# Altium PCB Pro_Micro_582V0.1.PcbDoc
Units mil, origin at the board's own origin, x right, y up, seen from the top; angles counter-clockwise.
Board outline 1377.89 x 700 mil, 4 copper layers (Top Layer, GND, POWER, Bottom Layer), stack 23.756 mil thick; 23 components, 43 nets, 148 pads, 90 vias.
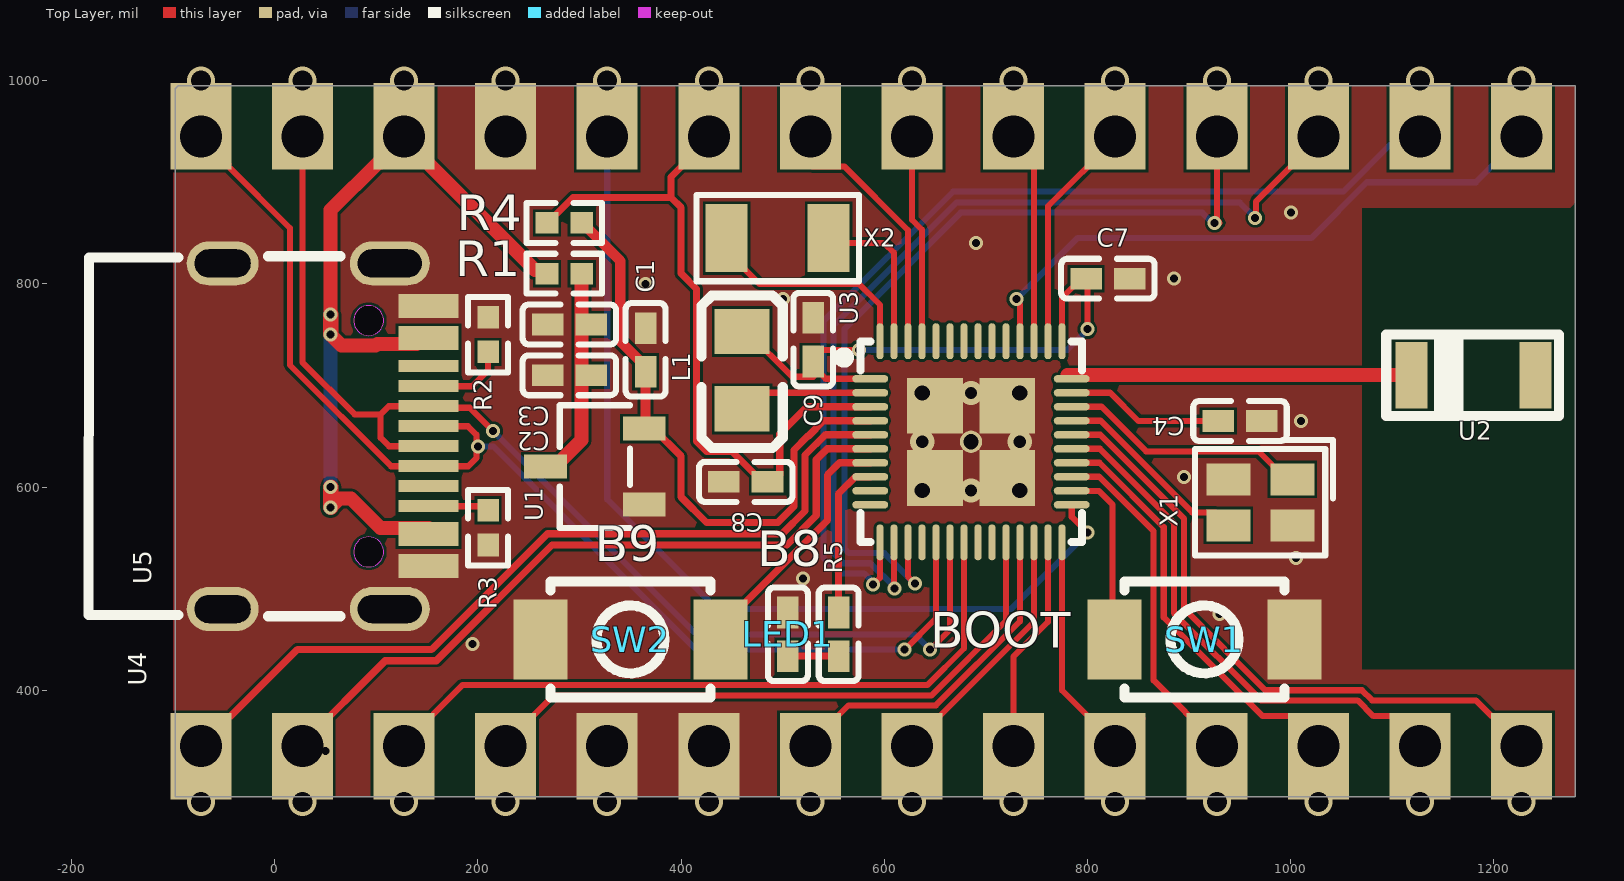
[diagram p0: Top Layer view]
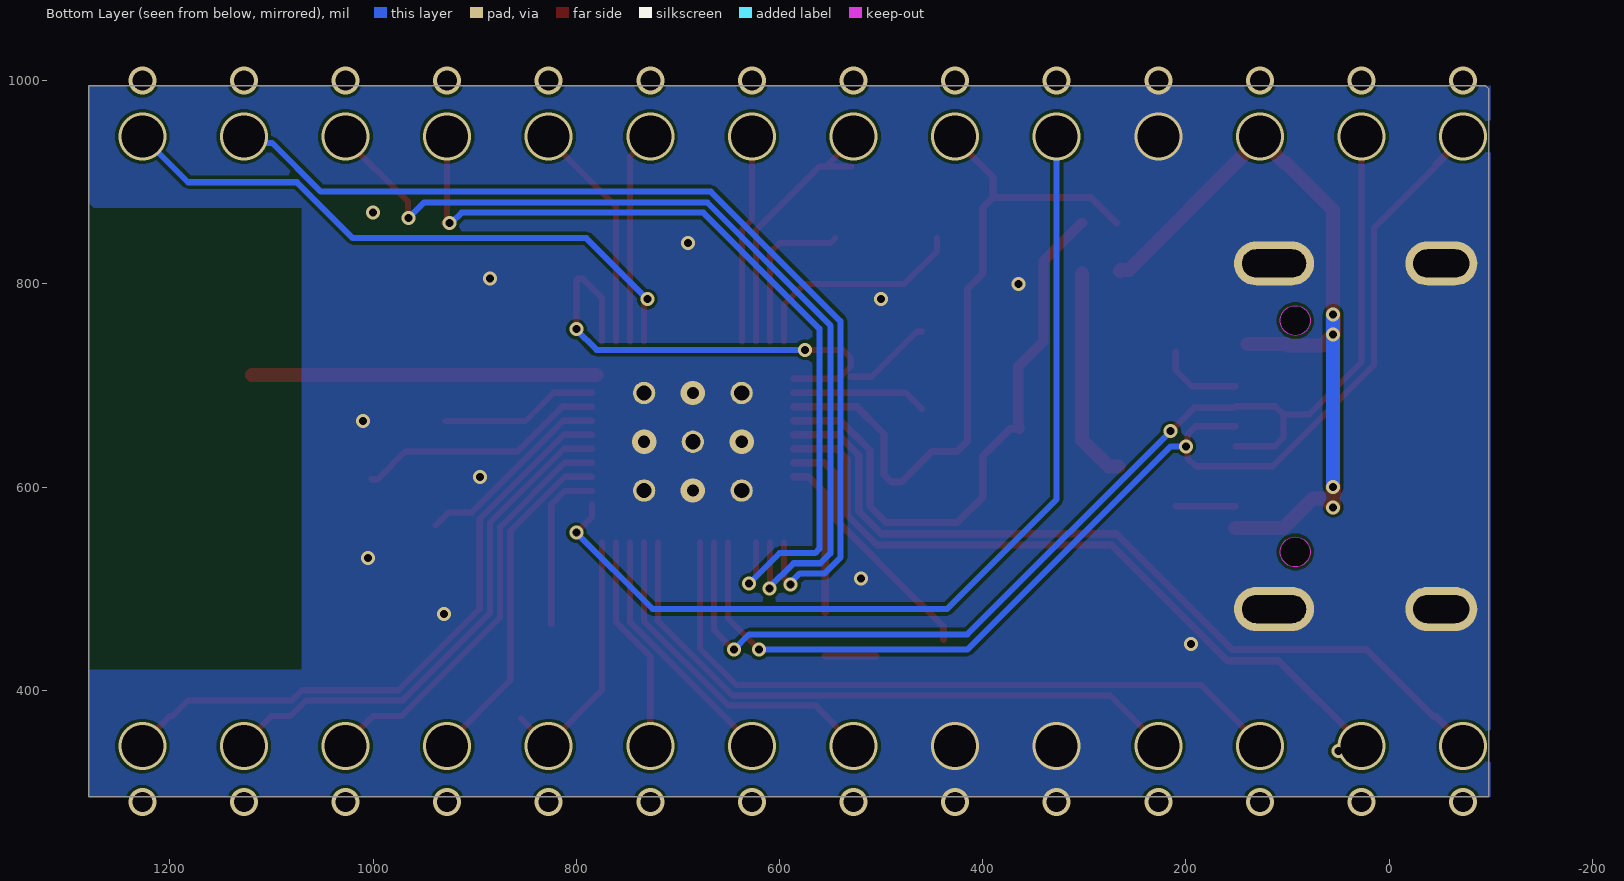
[diagram p1: Bottom Layer view, seen from below]
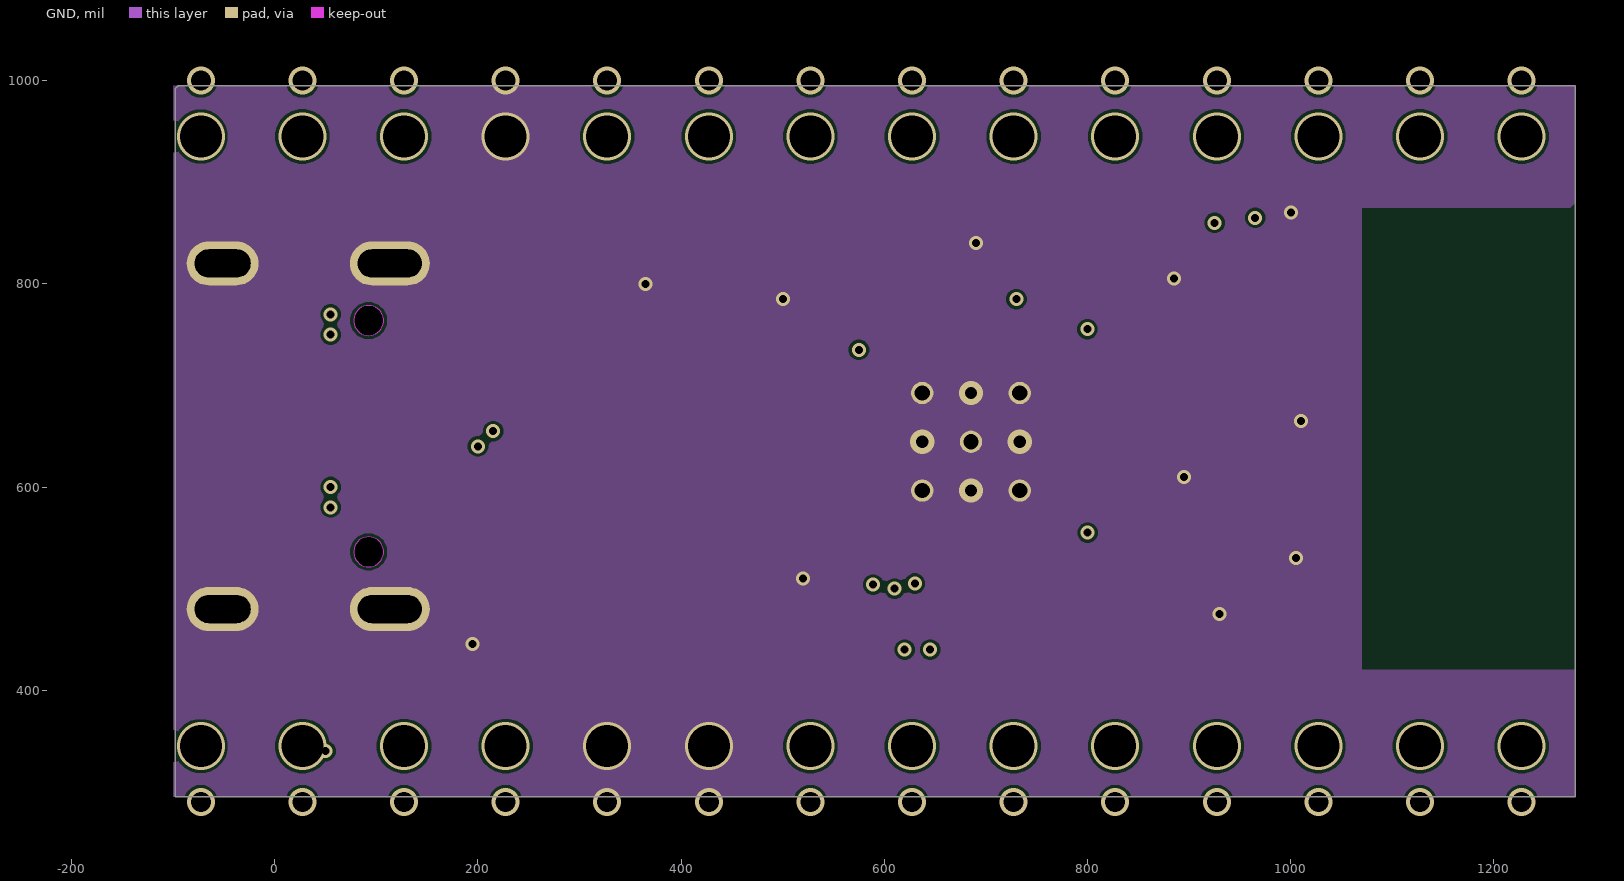
[diagram p2: GND]
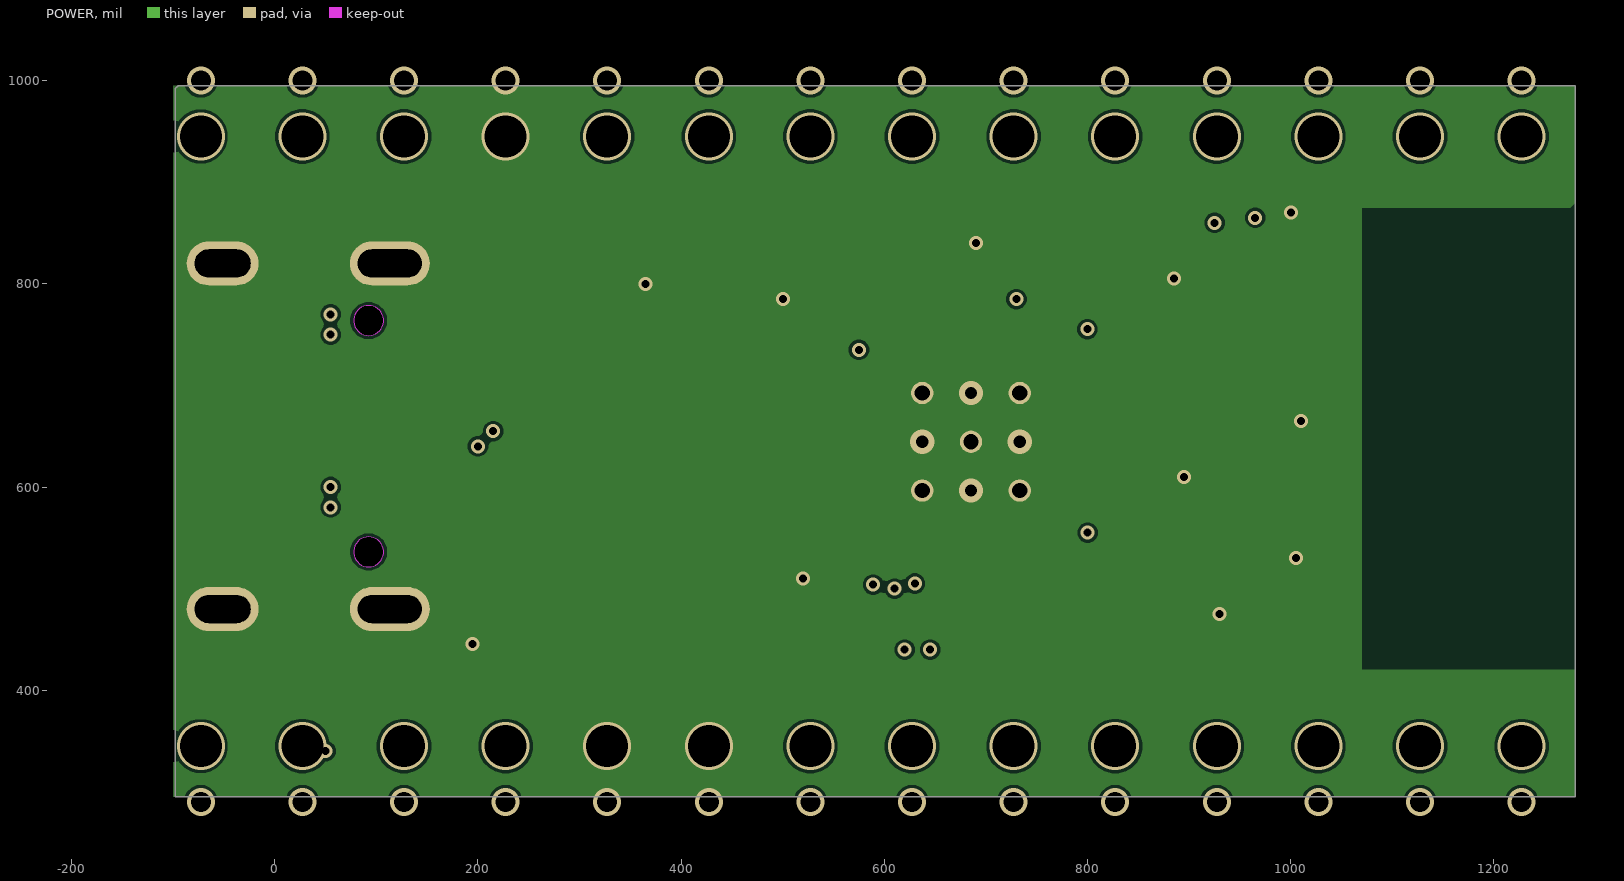
[diagram p3: POWER]

## Layer stack, top to bottom
Top Solder: solder mask 0.4, Solder Resist, Dk 3.5
Top Layer: signal copper 1.4
Dielectric 2: prepreg 2.8, PP-006, Dk 4.1
GND: signal copper 1.378
Dielectric 1: dielectric 12.6, FR-4, Dk 4.8
POWER: signal copper 1.378
Dielectric 3: prepreg 2.8, PP-006, Dk 4.1
Bottom Layer: signal copper 1.4
Bottom Solder: solder mask 0.4, Solder Resist, Dk 3.5

## Board outline
1280,295 -97.89,295 -97.89,992.11 -95,995 1280,995

## Design rules (kind name [scope] priority, off if disabled: settings)
Clearance [All] p1: gap=3 ignorepadtopadclearanceinfootprint=FALSE except(0: Arc-Text Track-Text SMDPad-Text THPad-Text Via-Text Fill-Text Poly-Text Region-Text Text-Text Text-Hole; 4: Arc-Arc Arc-Track Track-Track)
ComponentClearance [All] p1: gap=0 collisioncheckmode=3 verticalgap=0 showdistances=FALSE donotcheckwithout3dbody=TRUE
HoleSize [All] p1: absolutevalues=TRUE maxlimit=118.11 minlimit=1 maxpercent=80.000 minpercent=20.000
HoleToHoleClearance [All] p1: gap=0 allowstackedmicrovias=TRUE
MinimumSolderMaskSliver [All] p1: minsoldermaskwidth=0
PlaneConnect [All] p1: planeconnectstyle=Direct reliefexpansion=20 reliefentries=4 reliefconductorwidth=10 reliefairgap=10
PolygonConnect [All] p1: connectstyle=Direct reliefconductorwidth=10 reliefentries=4 polygonreliefangle="90 Angle" airgapwidth=10
RoomDefinition MCU [InComponentClass('MCU')] p1: confinementstyle=ConfineIn formatcopy=TRUE lockcomponents=FALSE outline -2570,-1895 -570,-1895 -570,-895 -2570,-895
RoutingVias [All] p1: holewidth=28 width=50 viastyle="Through Hole" minholewidth=0 minwidth=1 maxholewidth=78.74 maxwidth=78.74
SilkToSilkClearance [All] p1: silktosilkclearance=0
SilkToSolderMaskClearance [IsPad] p1: minsilkscreentomaskgap=0 clearancetoexposedcopper=TRUE
SolderMaskExpansion [All] p1: expansion=4 istentingtop=FALSE
Width [All] p1: maxlimit=15 minlimit=4 preferedwidth=4 midlayer1_maxwidth=10 midlayer2_maxwidth=10 minimp=50.000000 maximp=50.000000 favimp=50.000000
23 further rules are at their usual default settings.

## Components (designator, comment, footprint, x,y, rotation, side; value= is the part's Value field where it differs from the comment)
C1 "100nF" C0402 365,735 r270 top
C2 "10nF" C0402 290,710 r0 top
C3 "100nF" C0402 290,760 r0 top
C4 "2.2uF" C0402 950,665 r0 top
C7 "100nF" C0402 820,805 r0 top
C8 "2.2uF" C0402 463.54,605 r0 top
C9 "2.2uF" C0402 530,745 r270 top
L1 "22uH" L0805 460,715 r90 top
LED1 "0R" C0402 505,455 r270 top
R1 "0R" R0402 285,810 r180 top
R2 "5.1K" R0402 210,750 r90 top
R3 "5.1K" R0402 210,560 r270 top
R4 "0R" R0402 285,860 r0 top
R5 "220r" C0402 555,455 r270 top
SW1 "JT1185SAEM" SW-SMD_L3.9-W2.9-P4.15-LS5.0 915,450 r0 top
SW2 "JT1185SAEM" SW-SMD_L3.9-W2.9-P4.15-LS5.0 350,450 r180 top
U1 "XC6206P332MR" SOT-23-3_L2.9-W1.6-P1.90-LS2.8-BR 315,620 r0 top
U2 "RFANT3216120A5T" FILTER-SMD_1206-2P-L3.2-W1.6-L 1180,710 r0 top
U3 "CH582M" QFN48_5X5 685.24,644.52 r270 top locked
U4 "PROMICRO" PROMICRO邮票孔 565,645 r90 top locked
U5 "20009-UCAF001-X" TYPE-C-SMD_20009-UCAF001-X 50,650 r270 top locked
X1 "X201632MOB4SI" CRYSTAL-SMD_4P-L2.0-W1.6-BL-2 970,585 r180 top value=32MHz
X2 "SC-32S32.768kHz20PPM12.5pF" OSC-SMD_L3.2-W1.5 495,845 r0 top value=-

## Footprints (in the part's own frame and the unit in brackets; to place one, negate y for a bottom-side part, rotate by r counter-clockwise, add the part's x,y. Pads: shape width x height; smd on the part's side, far side on the other; paste and mask are expansions set on the pad)
C0402 [mm]
  rect 0.79x0.54 smd: 1(-0.545,0) 2(0.545,0)
  silkscreen extent -1.17,-0.5 1.17,0.5
CRYSTAL-SMD_4P-L2.0-W1.6-BL-2 [mm]
  rect 1.1x0.8 smd mask+0.051: 1(-0.8,-0.575) 2(0.8,-0.575) 3(0.8,0.575) 4(-0.8,0.575)
  silkscreen extent -1.82,-1.56 1.64,1.33
FILTER-SMD_1206-2P-L3.2-W1.6-L [mm]
  rect 0.8x1.66 smd mask+0.051: 1(-1.55,0) 2(1.55,0)
  silkscreen extent -2.19,-1.02 2.13,1.02
L0805 [mil]
  rect 44.59x54.21 smd: 1(-38.05,0) 2(38.04,0)
  silkscreen extent -77,-40 73,40
OSC-SMD_L3.2-W1.5 [mm]
  rect 1.05x1.7 smd mask+0.051: 1(-1.275,0) 2(1.275,0)
  silkscreen extent -2.03,-1.08 2.03,1.08
PROMICRO邮票孔 [mil]
  rect 85x60 smd: 1(310,437.8) 2(310,337.8) 3(310,237.8) 4(310,137.8) 5(310,37.8) 6(310,-62.2) 7(310,-162.2) 8(310,-262.2) 9(310,-362.2) 10(310,-462.2) 11(310,-562.2) 12(310,-662.2) 13(-310,437.8) 14(-310,337.8) 15(-310,237.8) 16(-310,137.8) 17(-310,37.8) 18(-310,-62.2) 19(-310,-162.2) 20(-310,-262.2) 21(-310,-362.2) 22(-310,-462.2) 23(-310,-562.2) 24(-310,-662.2) 25(310,537.8) 26(310,637.8) 27(-310,537.8) 28(-310,637.8)
QFN48_5X5 [mm]
  round 0.559 hole 0.381 mask+0.102: 0(-1.219,1.219) 0(-1.219,-1.219) 0(0,0) 0(1.219,1.219) 0(1.219,-1.219)
  rect 1.397x1.397 smd mask+0: 0(-0.901,0.908) 0(-0.901,-0.895) 0(0.902,0.908) 0(0.902,-0.895)
  oval 0.18x0.9 smd mask+0.051: 1(-1.575,-2.519) 2(-1.225,-2.519) 3(-0.875,-2.519) 4(-0.525,-2.519) 5(-0.175,-2.519) 6(0.175,-2.519) 7(0.525,-2.519) 8(0.875,-2.519) 9(1.225,-2.519) 10(1.575,-2.519) 25(1.575,2.519) 26(1.225,2.519) 27(0.875,2.519) 28(0.525,2.519) 29(0.175,2.519) 30(-0.175,2.519) 31(-0.525,2.519) 32(-0.875,2.519) 33(-1.225,2.519) 34(-1.575,2.519)
  oval 0.9x0.18 smd mask+0.051: 11(2.514,-2.275) 12(2.514,-1.925) 13(2.514,-1.575) 14(2.514,-1.225) 15(2.514,-0.875) 16(2.514,-0.525) 17(2.514,-0.175) 18(2.514,0.175) 19(2.514,0.525) 20(2.514,0.875) 21(2.514,1.225) 22(2.514,1.575) 23(2.514,1.925) 24(2.514,2.275) 35(-2.514,2.275) 36(-2.514,1.925) 37(-2.514,1.575) 38(-2.514,1.225) 39(-2.514,0.875) 40(-2.514,0.525) 41(-2.514,0.175) 42(-2.514,-0.175) 43(-2.514,-0.525) 44(-2.514,-0.875) 45(-2.514,-1.225) 46(-2.514,-1.575) 47(-2.514,-1.925) 48(-2.514,-2.275)
  silkscreen extent -2.51,-3.31 2.51,2.77
R0402 [mm]
  rect 0.566x0.54 smd: 1(-0.433,0) 2(0.433,0)
  silkscreen extent -0.94,-0.5 0.94,0.5
SOT-23-3_L2.9-W1.6-P1.90-LS2.8-BR [mm]
  rect 1.07x0.6 smd: 1(1.235,-0.95) 2(1.235,0.95) 3(-1.235,0)
  silkscreen extent -0.88,-1.54 0.88,1.54
SW-SMD_L3.9-W2.9-P4.15-LS5.0 [mm]
  rect 1.35x2 smd: 1(-2.25,0) 2(2.25,0)
  silkscreen extent -2,-1.45 2,1.45
TYPE-C-SMD_20009-UCAF001-X [mm]
  oval 1.1x2 hole 0.7 slot 1.6 at 90 deg mask+0.051: 1(-4.32,1.606) 2(4.32,1.606)
  oval 1.1x1.8 hole 0.7 slot 1.4 at 90 deg mask+0.051: 3(4.32,-2.574) 4(-4.32,-2.574)
  rect 0.3x1.5 smd mask+0.051: A1(-3.4,2.573) A4(-2.6,2.573) A5(-1.25,2.573) A6(-0.25,2.573) A7(0.25,2.573) A8(1.25,2.574) A9(2.6,2.573) A12(3.4,2.573) B1(3.1,2.573) B4(2.3,2.573) B5(1.75,2.573) B6(0.75,2.573) B7(-0.75,2.573) B8(-1.75,2.574) B9(-2.3,2.573) B12(-3.1,2.573)
  Keep-Out Layer board cut-out: -2.515,1.076 -2.552,1.239 -2.656,1.369 -2.807,1.442 -2.973,1.442 -3.124,1.369 -3.228,1.239 -3.265,1.076 -3.265,1.076 -3.228,0.913 -3.124,0.783 -2.973,0.71 -2.807,0.71 -2.656,0.783 -2.552,0.913 -2.515,1.076
  Keep-Out Layer board cut-out: 3.265,1.076 3.228,1.239 3.124,1.369 2.973,1.442 2.807,1.442 2.656,1.369 2.552,1.239 2.515,1.076 2.515,1.076 2.552,0.913 2.656,0.783 2.807,0.71 2.973,0.71 3.124,0.783 3.228,0.913 3.265,1.076
  silkscreen extent -4.5,-5.92 4.5,0.37

## Part data
C1 C2 C3 C4 C7 C8 C9: library part 电容, BOM_Manufacturer=YAGEO, BOM_Manufacturer Part=CC0805KKX5R6BB106, BOM_Supplier=LCSC, BOM_Supplier Part=C89832, nameAlias=Capacitance, spicePre=C, spiceSymbolName=CC0805KKX5R6BB106
L1: BOM_JLCPCB Part Class="Extended Part", BOM_Manufacturer="TAIYO YUDEN(太诱)", BOM_Manufacturer Part=CBC2012T220K, BOM_Supplier=LCSC, BOM_Supplier Part=C223184, Contributor=LCSC, nameAlias=Inductance, spicePre=L, spiceSymbolName=CBC2012T220K
LED1 R1 R2 R3 R4 R5: library part 电阻, BOM_JLCPCB Part Class="Basic Part", BOM_Manufacturer=UniOhm, BOM_Manufacturer Part=0603WAF1002T5E, Resistance (Ohms)=10K, BOM_Supplier=LCSC, BOM_Supplier Part=C25804, nameAlias=Resistance, spicePre=R, spiceSymbolName=0603WAF1002T5E
SW1 SW2: BOM_JLCPCB Part Class="Extended Part", BOM_Manufacturer=NAMAE(韩国南涯), BOM_Manufacturer Part=JT1185SAEM, BOM_Supplier=LCSC, BOM_Supplier Part=C465068, Contributor=LCSC, spicePre=S, spiceSymbolName=JT1185SAEM
U1: BOM_JLCPCB Part Class="Basic Part", BOM_Manufacturer=TOREX, BOM_Manufacturer Part=XC6206P332MR, BOM_Supplier=LCSC, BOM_Supplier Part=C5446, spicePre=U, spiceSymbolName=XC6206P332MR
U2: Central Frequency=-, JLCPCB Part Class="Extended Part", Manufacturer=Walsin(华新科), Operating Temperature=-40℃~+85℃, Add into BOM=yes, Antenna Type=芯片天线, Bandwidth=-, Convert to PCB=yes, Datasheet=https://atta.szlcsc.com/upload/public/pdf/source/20180326/C127629_E7A81F7A36316F7BB6F0FA74BB27F225.pdf, Device=RFANT3216120A5T, Impedance=-, LCSC Part Name=RFANT3216120A5T, Manufacturer Part=RFANT3216120A5T, Name=RFANT3216120A5T, Peak Gain=-, Polarization Type=-, Power capacity=-, Supplier=LCSC, Supplier Footprint=SMD,3.2x1.6x1.2mm, Supplier Part=C127629, Symbol=RFANT3216120A5T, VSWR=2
U3: "RISC-V MCU with BLE/2*USB/ADC/PWM/SPI/I2C/4*UART"
U5: JLCPCB Part Class="Extended Part", LCSC Part Name="TYPE C", Manufacturer=MINTRON(明硕), Add into BOM=yes, Convert to PCB=yes, Datasheet=https://atta.szlcsc.com/upload/public/pdf/source/20220705/4C04992B6F70FB490BC74B4779796E6C.pdf, Device=20009-UCAF001-X, Manufacturer Part=20009-UCAF001-X, Name=20009-UCAF001-X, Supplier=LCSC, Supplier Footprint=SMD, Supplier Part=C3148200, Symbol=20009-UCAF001-X
X1: Frequency Stability=±20ppm, Frequency Tolerance=±10ppm, JLCPCB Part Class="Extended Part", LCSC Part Name="YSX211SL 32MHz ±10ppm 12pF", Load Capacitance=12pF, Manufacturer=YXC(扬兴晶振), Operating Temperature=-40℃~+85℃, Add into BOM=yes, Convert to PCB=yes, Crystal Type=贴片无源晶振, Datasheet=https://atta.szlcsc.com/upload/public/pdf/source/20210329/C108154_97241DDF47B5B71D7D93F8906D63DA2F.pdf, Device=X201632MOB4SI, Manufacturer Part=X201632MOB4SI, Name=32MHz, Supplier=LCSC, Supplier Footprint=SMD2016-4P, Supplier Part=C2682773, Symbol=X201632MOB4SI
X2: JLCPCB Part Class="Extended Part", LCSC Part Name="32.768kHz 20PPM 12.5pF", Load Capacitance=-, Manufacturer=Seiko(精工), Add into BOM=yes, Convert to PCB=yes, Crystal Type=-, Datasheet=https://atta.szlcsc.com/upload/public/pdf/source/20170713/C97606_1499914220652816606.pdf, Device=SC-32S32.768kHz20PPM12.5pF, Manufacturer Part=SC-32S32.768kHz20PPM12.5pF, Name=-, Operating Temperature=-, Supplier=LCSC, Supplier Footprint=SMD3215-2P, Supplier Part=C97606, Symbol=SC-32S32.768kHz20PPM12.5pF
U4: Contributor=KongC, spicePre=U, spiceSymbolName=PROMICRO

## Via types
v1: diameter 13.78, hole 7.87, Top Layer to Bottom Layer, tented both sides, 30 vias
v2: diameter 27.56, hole 19.69, Top Layer to Bottom Layer, 28 vias
v3: diameter 47.24, hole 41.34, Top Layer to Bottom Layer, 28 vias
v4: diameter 24, hole 12, Top Layer to Bottom Layer, tented both sides, 4 vias

## Nets (pads, with @x,y where several pads share a name; then routed paths per layer and width w, separated by ;. In a path a pad name is that pad's centre, name@x,y a point inside that pad or via, vN(x,y) a via of type N, cw(c..) or ccw(c..) an arc to the next point about the centre after c; other vN are vias at no path point)
+5: R1.2 U4.1 U5.A4 U5.A9 U5.B4 U5.B9 | length 811.4
  Top Layer w13.75: v1(55,600) v1(55,580) 63.52,588.52 74.91,588.52 103.98,559.45 U5.B4 ; v1(55,750) 65.86,739.14 99.39,739.14 100.9,740.64 U5.B9@139.59,740.64 ; v1(55,770) 55,872.44 101.94,919.38 104.08,919.38 127.2,942.5 U4.1@127.2,944.64 ; U4.1@139.73,929.98 255.95,813.76 263.7,813.76 R1.2@265,812.45
  Top Layer w15: v1(55,580) v1(55,600) ; v1(55,750) v1(55,770)
  Bottom Layer w13.75: v1(55,600) v1(55,750) v1(55,770)
  other v2: 127.2,1000
  other v3: 127.2,945
ADC0: U3.36 U4.8 | length 238.9
  Top Layer w6: U3.36 761.03,876.33 827.2,942.5 v3(827.2,945) U4.8
  other v2: 827.2,1000
ADC1: U3.37 U4.7 | length 209.8
  Top Layer w6: v3(727.2,945) 747.25,924.95 U3.37
  other v2: 727.2,1000
ADC2: U3.46 U4.5 | length 270
  Top Layer w6: v3(527.2,945) 527.2,942.5 U4.5@554.2,915.5 ; U4.5@529.2,915.5 U4.5@554.2,915.5 ; U3.46 623.24,852.87 560.6,915.5 U4.5@554.2,915.5
  other v2: 527.2,1000
ADC3: U3.45 U4.6 | length 205.6
  Top Layer w6: v3(627.2,945) 627.2,863.04 637.02,853.23 U3.45
  other v2: 627.2,1000
DFU_SWITCH: SW1.1 U3.26 | length 163.6
  Top Layer w6: U3.26 784.5,596.2 811.12,596.2 824.68,582.64 SW1.1@824.68,465
GND: C1.1 C2.1 C3.1 C4.2 C7.2 C8.1 C9.1 LED1.1 R2.2 R3.2 SW1.2 SW2.2 U1.1 U3.0 U4.2 U4.15 U4.16 U5.1 U5.2 U5.3 U5.4 U5.A1 U5.A12 U5.B1 U5.B12 X1.2 X1.4
  other v1: 194.75,445.25 930,475 520,510 1005,530 895,610 1010,665 500,785 365,800 885,805 690,840 1000,870
  other v2: 327.2,290 427.2,290 227.2,1000
  other v3: 327.2,345 427.2,345 227.2,945
  other v4: 685.24,596.52 637.24,644.52 733.24,644.52 685.24,692.52
MISO: U3.11 U4.11 | length 1000.8
  Top Layer w6: v1(588.95,503.95) 595.68,510.68 U3.11
  Bottom Layer w6: v1(588.95,503.95) 588.95,506.05 580,515 555.56,515 540,530.56 540,763.28 667.54,890.82 1051.68,890.82 1099.46,938.61 1120.81,938.61 v3(1127.2,945)
  other v2: 1127.2,1000
MOSI: U3.12 U4.10 | length 922.3
  Top Layer w6: U3.12 609.46,500.54 v1(610,500) ; v1(965,865) 965.59,865.59 965.59,880.89 1027.2,942.5 v3(1027.2,945)
  Bottom Layer w6: v1(610,500) 610,501.12 586.12,525 559.7,525 550,534.7 550,759.14 670.86,880 950,880 v1(965,865)
  other v2: 1027.2,1000
NetC2_2: C2.2 C3.2 R1.1 U1.3 | length 210.2
  Top Layer w13.75: U1.3 275.63,620 302.04,646.42 R1.1
NetC4_1: C4.1 U3.33 | length 155.6
  Top Layer w6: U3.33 822.25,692.75 850,665 C4.1
NetLED1_2: LED1.2 R5.2 | length 50
  Top Layer w7: LED1.2 R5.2
NetR2_1: R2.1 U5.A5 | length 83.2
  Top Layer w6: U5.A5 194.21,699.21 210,715 R2.1
NetR3_1: R3.1 U5.B5 | length 58.7
  Top Layer w6: U5.B5 R3.1@210,581.1
NetU2_1: U2.1 U3.34 | length 339
  Top Layer w13.75: U3.34@780,710.03 U2.1
PA6: U3.38 U4.12 | length 606.4
  Top Layer w6: v1(730,785) 730,782.89 733.47,779.42 U3.38
  Bottom Layer w6: v1(730,785) 790,845 1020,845 1075,900 1182.2,900 v3(1227.2,945)
  other v2: 1227.2,1000
PA7: C1.2 R4.2 U1.2 U3.4 | length 587.9
  Top Layer w7: U1.2 372.87,657.4 400,630.27 400,590 425,565 495,565 511,581 511,636.56 524.44,650 525,650 540.19,665.19 U3.4
  Top Layer w10: R4.2 302.55,860 340,822.55 340,743.46 365,718.46 C1.2 365,658.79 U1.2
PA8: U3.5 U4.28 | length 819.5
  Top Layer w7: v3(-72.8,345) -72.8,347.5 -46.3,374 -43.8,374 22.2,440 154.44,440 268.44,554 499.56,554 522,576.44 522,631.44 541.97,651.41 U3.5
  other v1: -65,340
  other v2: -72.8,290
PA9: U3.6 U4.27 | length 713.8
  Top Layer w7: v3(27.2,345) 27.2,347.5 108.7,429 159,429 273,543 504.11,543 533,571.89 533,626.89 543.74,637.63 U3.6
  other v1: 50,340
  other v2: 27.2,290
PB0: U3.24 U4.20 | length 260.4
  Top Layer w6: U3.24 774.81,399.89 827.2,347.5 v3(827.2,345) U4.20@854.2,372
  other v2: 827.2,290
PB1: U3.23 U4.19 | length 214.6
  Top Layer w6: v3(727.2,345) 727.2,433.36 761.03,467.18 U3.23
  other v2: 727.2,290
PB2: U3.22 U4.18 | length 250.3
  Top Layer w6: v3(627.2,345) 627.2,347.5 747.25,467.55 U3.22
  other v2: 627.2,290
PB3: U3.21 U4.17 | length 336.3
  Top Layer w6: v3(527.2,345) 527.2,347.5 564.7,385 650.56,385 733.47,467.91 U3.21
  other v2: 527.2,290
PB5: U3.19
PB8: R5.1 U3.8 | length 155
  Top Layer w7: R5.1 555,593.58 571.47,610.05 U3.8
PB9: SW2.1 U3.7 | length 253.2
  Top Layer w7: SW2.1 438.59,462.8 461.66,485.87 462.54,485.87 544,567.33 544,612 555.85,623.85 U3.7
PB18: U3.30 U4.24 | length 623.3
  Top Layer w6: U3.30 812.48,651.41 895,568.89 895,480 975,400 1070,400 1080,390 1182.2,390 1197.7,374.5 1200.2,374.5 1227.2,347.5 v3(1227.2,345)
  other v2: 1227.2,290
PB19: U3.29 U4.23 | length 517.5
  Top Layer w6: U3.29 812.12,637.63 885,564.75 885,475.86 970.86,390 1065.86,390 1081.36,374.5 1100.2,374.5 1127.2,347.5 v3(1127.2,345)
  other v2: 1127.2,290
PB20: U3.28 U4.22 | length 421.8
  Top Layer w6: U3.28 811.76,623.85 875,560.6 875,471.72 972.22,374.5 1000.2,374.5 1027.2,347.5 U4.22
  other v2: 1027.2,290
  other v3: 1027.2,345
PB23: U3.27 U4.21 | length 340
  Top Layer w6: U3.27 811.39,610.07 865,556.46 865,409.7 927.2,347.5 v3(927.2,345)
  other v2: 927.2,290
RESET: U3.25 U4.3 | length 939.7
  Top Layer w6: U3.25 784.41,570.59 v1(800,555)
  Bottom Layer w6: v3(327.2,945) 327.2,587.8 435,480 725,480 v1(800,555)
  other v2: 327.2,1000
RX0: U3.20 U4.14 | length 622.3
  Top Layer w6: v3(227.2,345) 227.2,347.5 274.7,395 646.42,395 719.69,468.27 U3.20
  other v2: 227.2,290
SCK: U3.13 U4.9 | length 845.1
  Top Layer w6: U3.13 623.24,511.76 v1(630,505) ; v3(927.2,945) 927.2,862.8 v1@930,860
  Bottom Layer w6: v1(630,505) 600,535 565,535 560.82,539.18 560.82,755.82 675,870 912.89,870 922.89,860 v1(925,860)
  other v2: 927.2,1000
TX0: U3.17 U4.13 | length 696.9
  Top Layer w6: v3(127.2,345) 127.2,347.5 184.7,405 642.28,405 678.35,441.08 U3.17
  other v2: 127.2,290
USB_N: U3.16 U4.25 U5.A7 U5.B7 | length 1151.1
  Top Layer w6: v3(27.2,945) 27.2,722.8 78.51,671.49 104.1,671.49 ; U5.A7 112.45,640.16 104.1,648.51 104.1,671.49 ; v1(215,655) 191.94,678.06 152.77,678.06 U5.B7 112.14,679.53 104.1,671.49 ; v1(645,440) 664.57,459.57 U3.16
  Bottom Layer w6: v1(215,655) 415,455 630,455 v1(645,440)
  other v2: 27.2,1000
USB_P: U3.15 U4.26 U5.A6 U5.B6 | length 1226.1
  Top Layer w6: U5.A6 190.16,659.84 198.51,651.49 198.51,641.49 v1(200,640) 198.51,638.51 198.51,628.51 190.47,620.47 U5.B6 114.53,620.47 15,720 15,820 15,854.7 U4.26@-45.8,915.5 ; v1(620,440) 650.8,470.8 U3.15 ; U4.26@-45.8,915.5 -72.8,942.5 v3(-72.8,945) -45.8,918 U4.26@-45.8,915.5
  Bottom Layer w6: v1(200,640) 215,640 415,440 v1(620,440)
  other v2: -72.8,1000
VCC: C8.2 R4.1 U3.3 U4.4 | length 699.8
  Top Layer w7: R4.1 268.47,860 293.47,885 390,885 ; v3(427.2,945) 427.2,942.5 390,905.3 390,885 ; U3.3 523.97,678.97 497.05,652.05 497.05,612.13 489.92,605 480.08,605 450.08,635 425,635 415,645 415,795 400,810 400,875 390,885
  other v2: 427.2,1000
VDCIA: C7.1 C9.2 L1.2 U3.1 U3.35 | length 564.5
  Top Layer w6: L1.2 464.81,753.04 509.31,708.54 C9.2@530,708.54 ; v1(575,735) 537.63,735 530,727.37 C9.2 530,718.62 542.09,706.53 U3.1 ; U3.35 774.81,786.19 793.62,805 C7.1 799.84,803.7 v1(799.84,755.29)
  Bottom Layer w6: v1(575,735) 780,735 800,755 800,755.22 v1@800.07,755.29
VSW: L1.1 U3.2 | length 132.6
  Top Layer w6: L1.1 475.79,692.75 U3.2
X32KI: U3.48 X2.1 | length 221.4
  Top Layer w6: X2.1 444.8,832.2 477.01,800 575,800 595.68,779.32 U3.48
X32KO: U3.47 X2.2 | length 157.3
  Top Layer w6: X2.2 550.2,840 600,840 609.46,830.54 U3.47
X32MI: U3.32 X1.1 | length 246.6
  Top Layer w6: U3.32 813.78,678.97 857.75,635 968.23,635 995.59,607.64 X1.1
X32MO: U3.31 X1.3 | length 196.7
  Top Layer w6: U3.31 812.84,665.19 902.92,575.11 925.76,575.11 X1.3
pads on no net: U2.2 U3.9 U3.10 U3.14 U3.18 U3.39 U3.40 U3.41 U3.42 U3.43 U3.44 U5.A8 U5.B8

## Polygon pours and split planes (outlines as drawn)
GND on Top Layer "GND_L01_P000" (solid, remove dead copper, pour order 0): -100,295 -100,995 1280,995 1280,295
GND on GND "GND_L02_P001" (solid, remove dead copper, pour order 1): -100,295 -100,995 1280,995 1280,295
GND on POWER "GND_L03_P002" (solid, remove dead copper, pour order 2): -100,295 -100,995 1280,995 1280,295
GND on Bottom Layer "GND_L04_P003" (solid, remove dead copper, pour order 3): -100,295 -100,995 1280,995 1280,295

## Other copper
Top Layer:
  pour cut-out: 1070,420 1280,420 1280,880 1275,875 1070,875
GND:
  pour cut-out: 1070,420 1280,420 1280,880 1275,875 1070,875
POWER:
  pour cut-out: 1070,420 1280,420 1280,880 1275,875 1070,875
Bottom Layer:
  pour cut-out: 1070,420 1280,420 1280,880 1275,875 1070,875

## Silkscreen, mask and mechanical layers (free items; w line width, h text height)
Top Overlay:
  text "B9" at 315,515 h60
  text "B8" at 475,510 h60
  text "BOOT" at 645,430 h60